# Altium PCB Due_Breakout_Board.PcbDoc
Units mil, origin at the board's own origin, x right, y up, seen from the top; angles counter-clockwise.
Board outline 6000 x 4000 mil, 4 copper layers (Top Layer, +5V Layer, +3.3V Layer, Bottom Layer), stack 30.634 mil thick; 39 components, 98 nets, 254 pads, 4 vias.
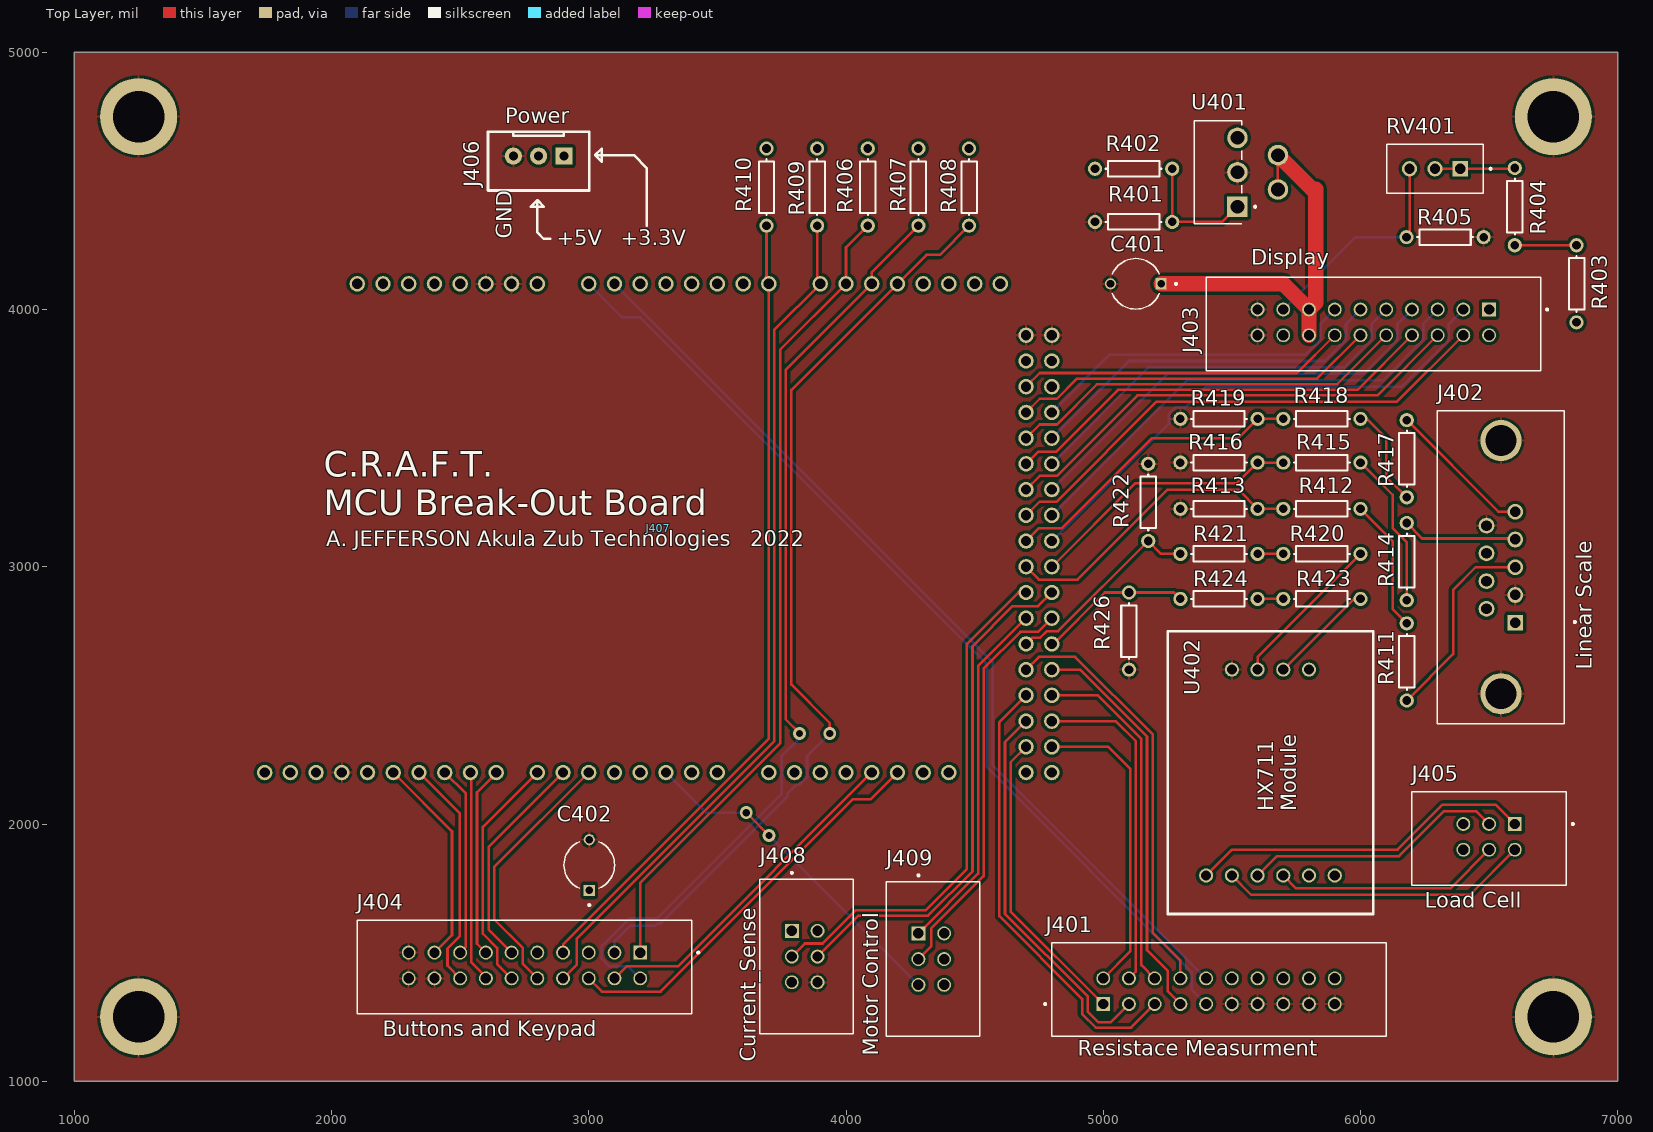
[diagram p0: Top Layer view]
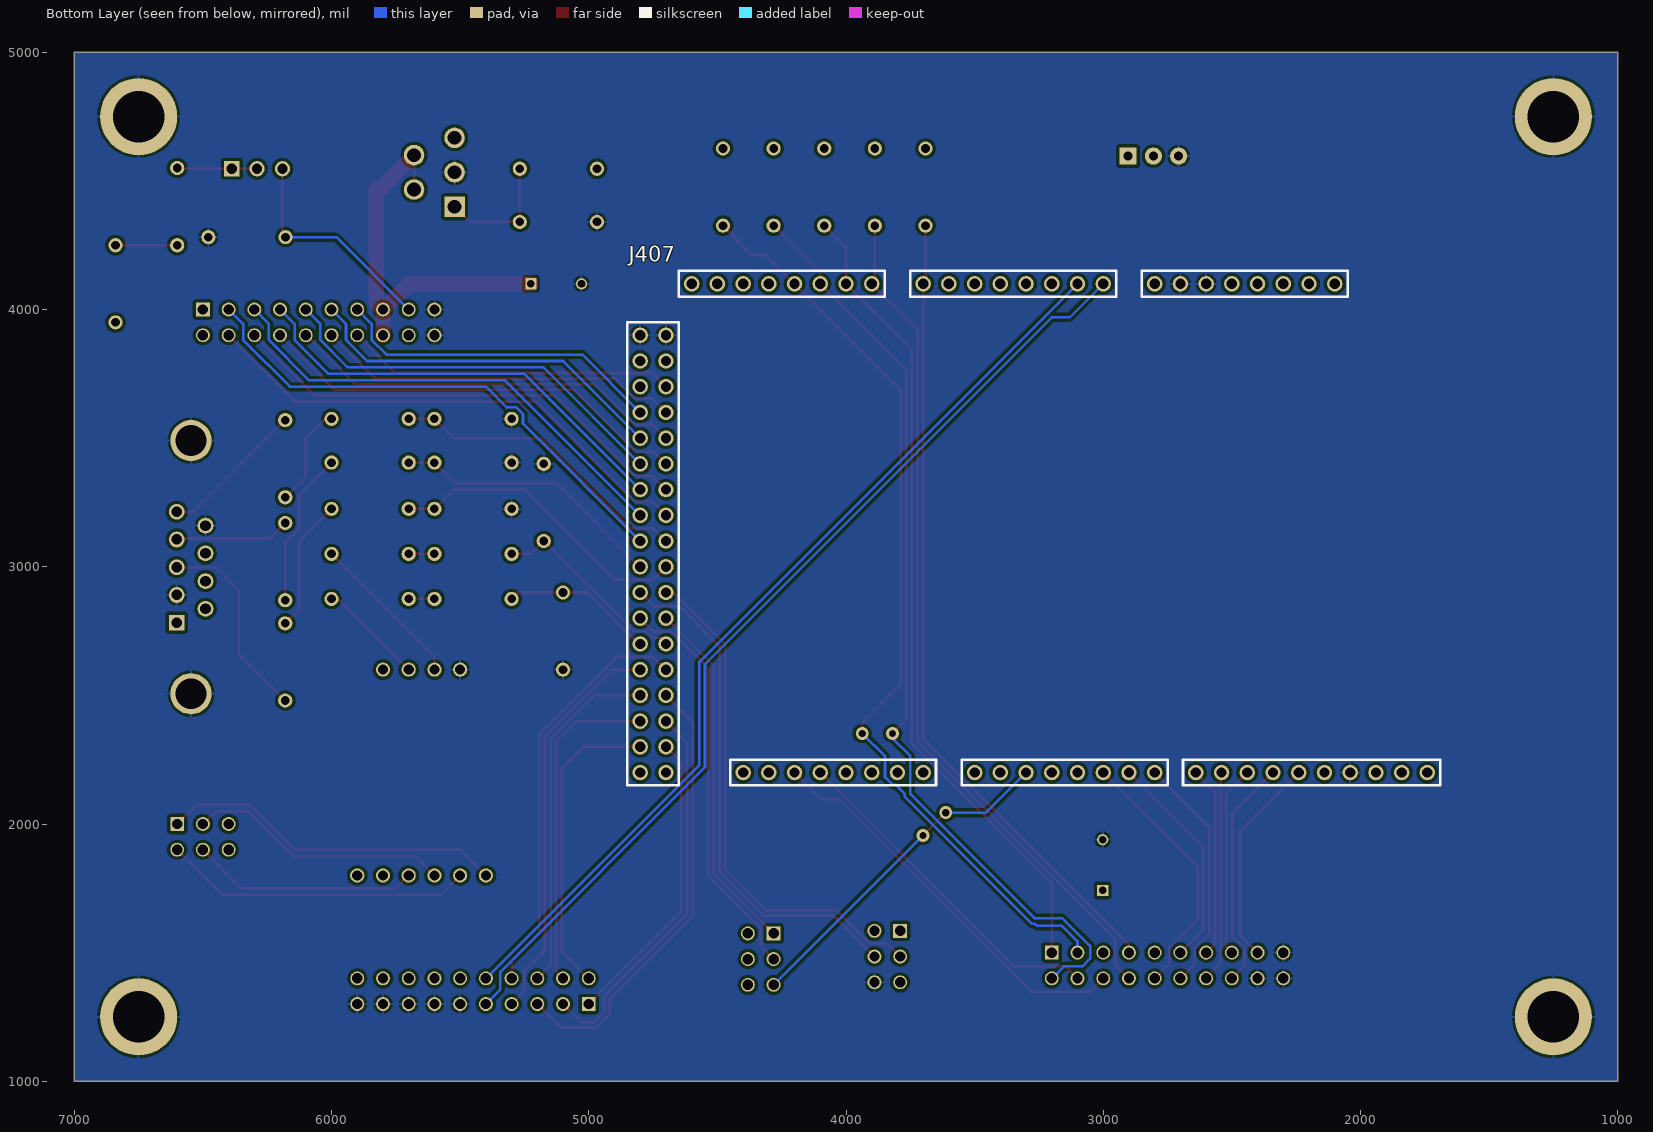
[diagram p1: Bottom Layer view, seen from below]
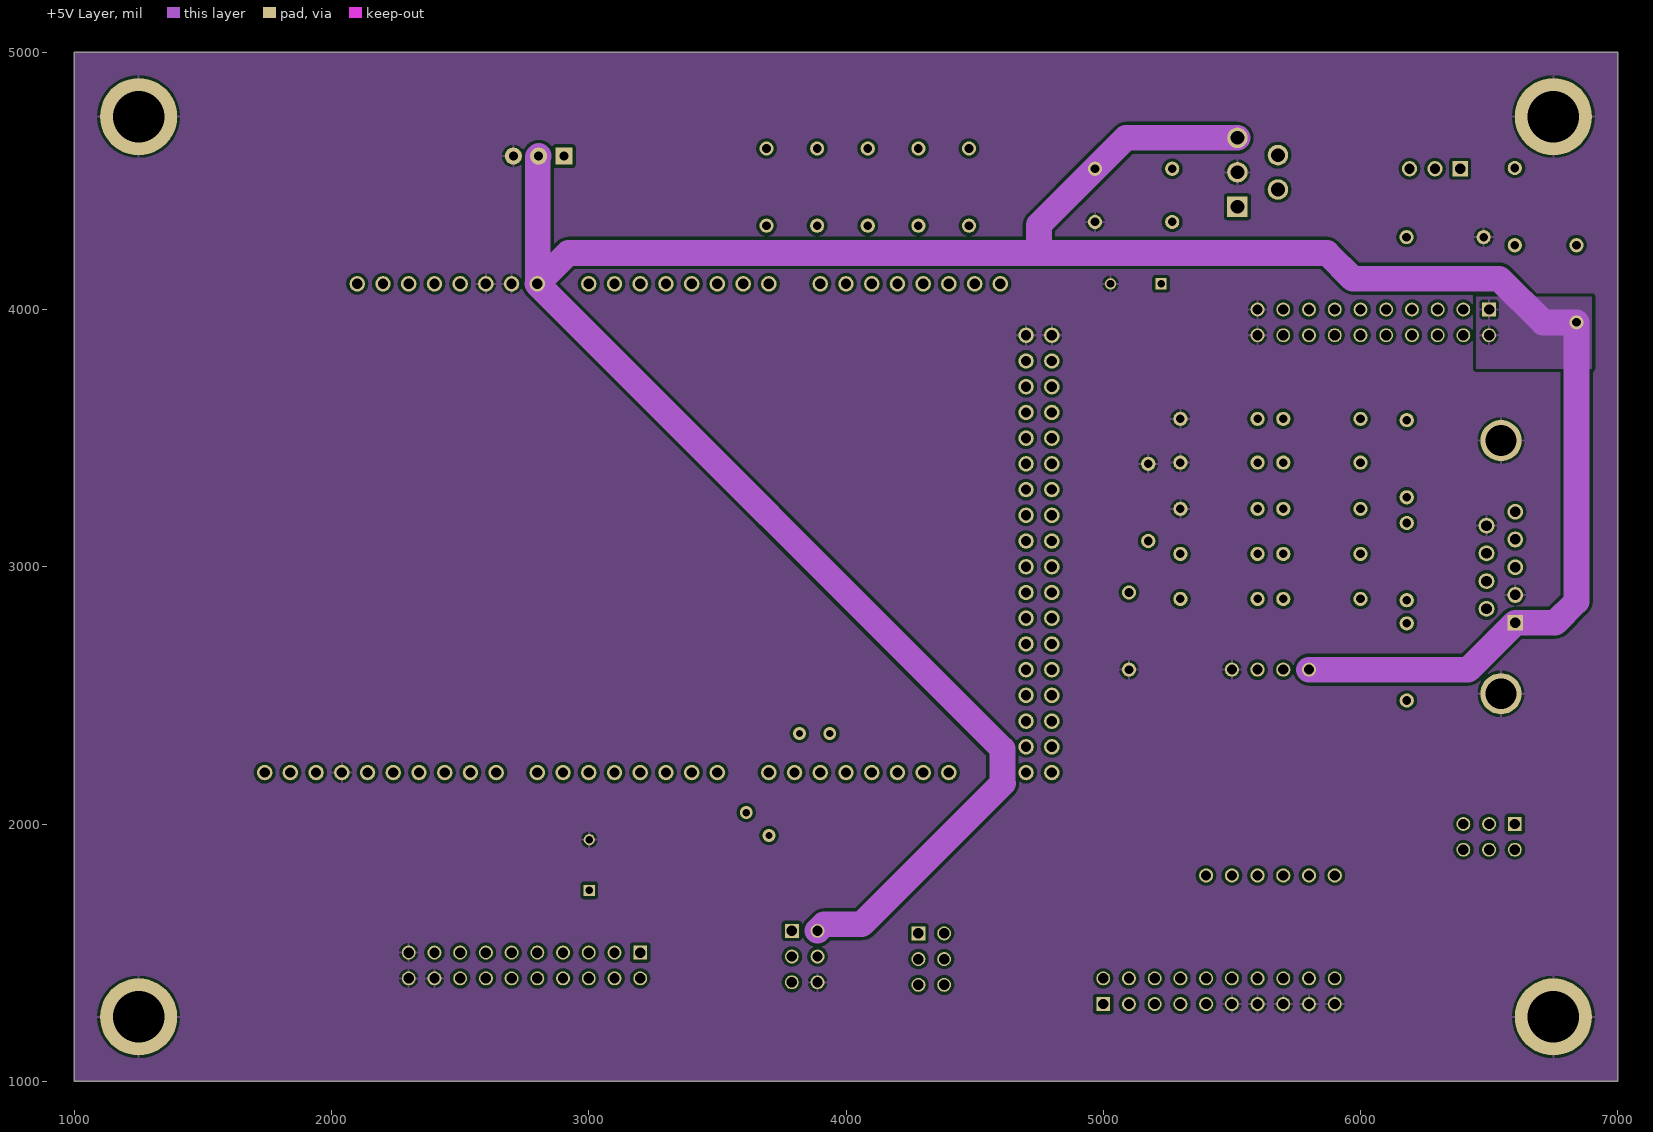
[diagram p2: +5V Layer]
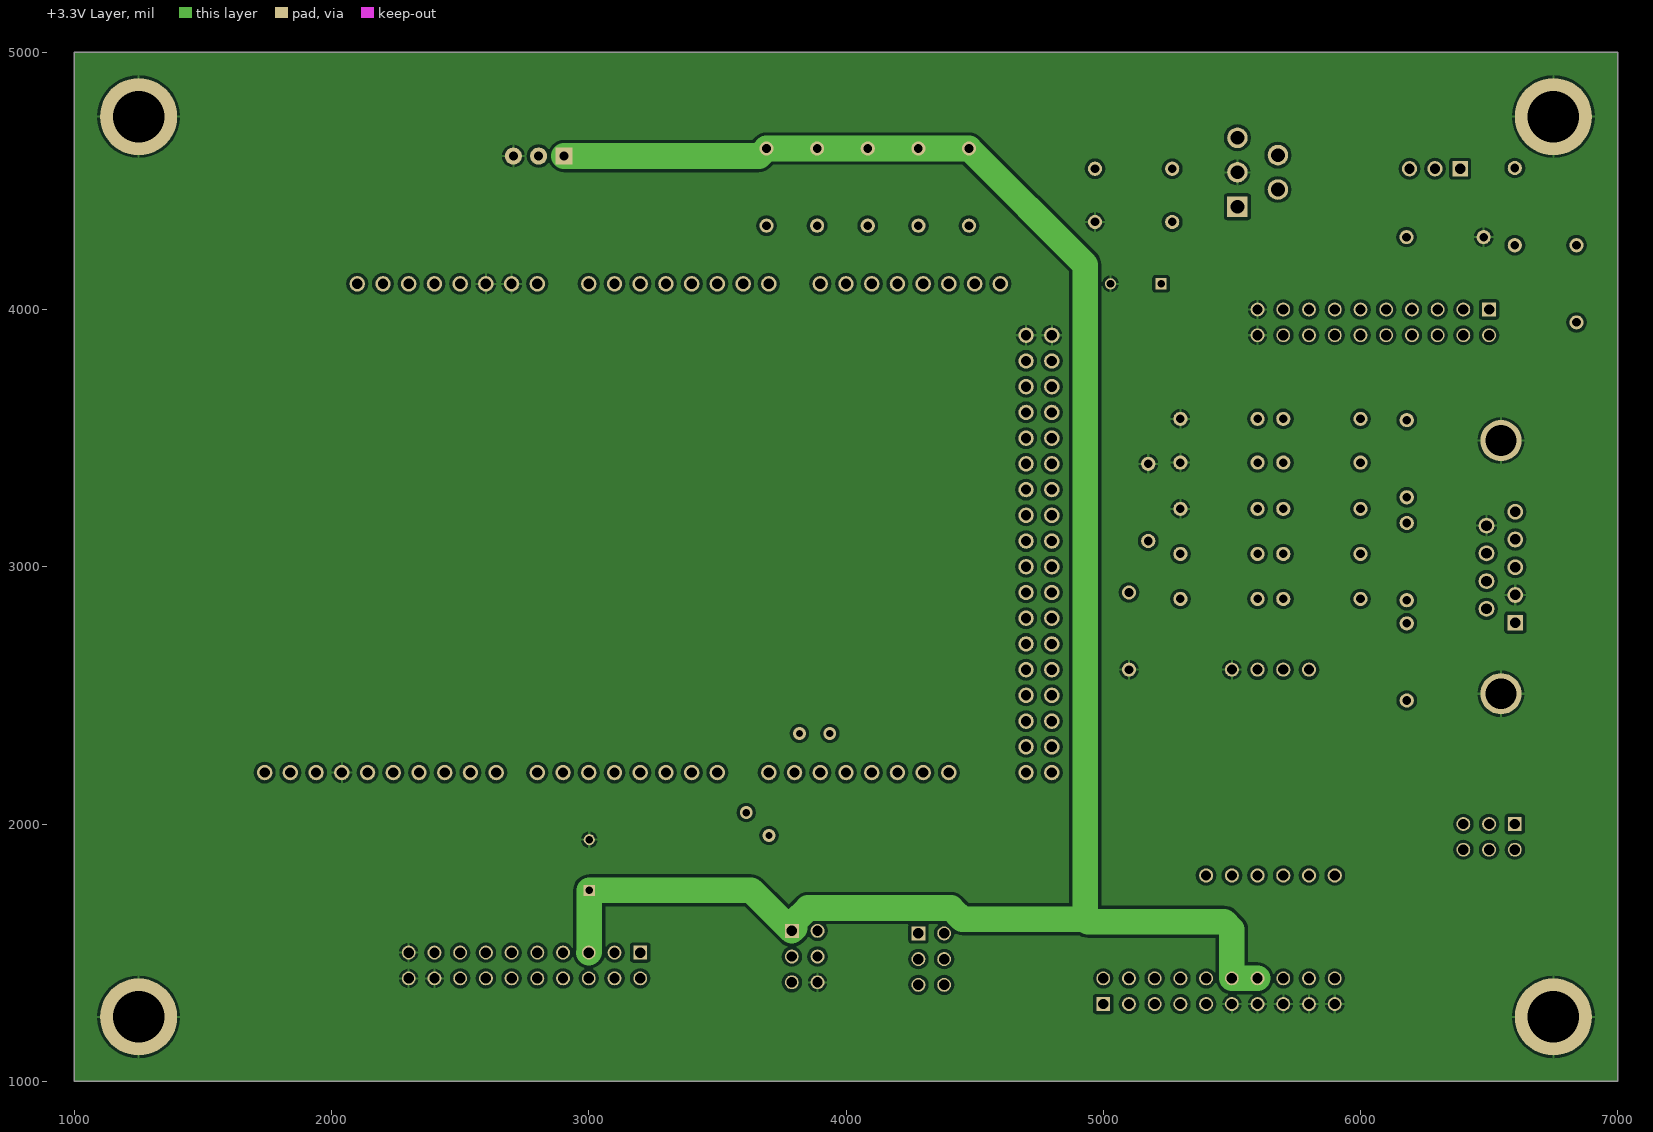
[diagram p3: +3.3V Layer]

## Layer stack, top to bottom
Top Solder: solder mask 0.4, Solder Resist, Dk 3.5
Top Layer: signal copper 1.4
Dielectric 1: core 10, FR-4, Dk 4.2
+5V Layer: signal copper 1.417
Dielectric 3: prepreg 5, Dk 4.2
+3.3V Layer: signal copper 1.417
Dielectric 2: core 10, Dk 4.2
Bottom Layer: signal copper 1.4
Bottom Solder: solder mask 0.4, Solder Resist, Dk 3.5

## Board outline
1000,1000 7000,1000 7000,5000 1000,5000

## Design rules (kind name [scope] priority, off if disabled: settings)
Clearance [All] p1: gap=11.81 ignorepadtopadclearanceinfootprint=FALSE
HoleSize [All] p1: absolutevalues=TRUE maxlimit=248.03 minlimit=1 maxpercent=80.000 minpercent=20.000
HoleToHoleClearance [All] p1: gap=19.68 allowstackedmicrovias=TRUE
PasteMaskExpansion [All] p1: expansion=1.97
PolygonConnect [All] p1: connectstyle=Relief reliefconductorwidth=10 reliefentries=4 polygonreliefangle="90 Angle" airgapwidth=10
RoutingVias [All] p1: holewidth=28 width=50 viastyle="Through Hole" minholewidth=19.68 minwidth=50 maxholewidth=28 maxwidth=50
SilkToSilkClearance [All] p1: silktosilkclearance=7
SilkToSolderMaskClearance [IsPad] p1: minsilkscreentomaskgap=7 clearancetoexposedcopper=TRUE
SolderMaskExpansion [All] p1: expansion=4
Width [All] p1: maxlimit=100 minlimit=10 preferedwidth=10
25 further rules are at their usual default settings.

## Classes and differential pairs
component class "Due_Breakout_Board supporting circuits": C401 C402 R401 R402 R403 R404 R405 R406 R407 R408 R409 R410 R411 R412 R413 R414 R415 R416 R417 R418 R419 R420 R421 R422 R423 R424 R426 RV401 U401 U402
component class "Due_Breakout_Board Headers": J6 J401 J402 J403 J404 J405 J406 J408 J409
component class Due_Breakout_Board: J407

## Components (designator, comment, footprint, x,y, rotation, side; value= is the part's Value field where it differs from the comment)
C401 "EEUHD1H1R0B" CAPPRD500W50D500H1100 5126.57,4100 r180 top
C402 "1uF" CAPPRD500W50D500H1100 3001.97,1840.55 r90 top
J401 "*" TE_1761681-7 5000,1300 r0 top locked
J402 "1-5747150-6" TE_1-5747150-6 6545.91,2998.39 r270 top
J403 "*" TE_1761681-7 6500,4000 r180 top
J404 "*" TE_1761681-7 3200,1500 r180 top
J405 "*" TE_1761681-1 6600,2000 r180 top
J406 "3pin Header Male Shrouded" "3Pin Header" 2805.12,4596.46 r180 top
J407 "Arduino Due Breakout" DUE_BREAKOUT 1740,2200 r0 top locked
J408 "*" TE_1761681-1 3789.37,1584.65 r270 top
J409 "*" TE_1761681-1 4281.5,1574.8 r270 top
R401 "7k" AXIAL-0.3 5118.11,4340.55 r0 top value=5%
R402 "3k" AXIAL-0.3 5118.11,4547.24 r180 top value=5%
R403 "7k" AXIAL-0.3 6840,4100 r270 top value=5%
R404 "7k" AXIAL-0.3 6600,4400 r270 top value=5%
R405 "3k" AXIAL-0.3 6328.74,4281.5 r180 top value=5%
R406 "1k" AXIAL-0.3 4084.65,4475.98 r90 top value=1K
R407 "1k" AXIAL-0.3 4281.5,4475.98 r90 top value=1K
R408 "1k" AXIAL-0.3 4478.35,4475.98 r90 top value=1K
R409 "1k" AXIAL-0.3 3887.8,4475.98 r270 top value=1K
R410 "1k" AXIAL-0.3 3690.94,4475.98 r270 top value=1K
R411 "1k" AXIAL-0.3 6180,2630 r270 top value=5%
R412 "3k" AXIAL-0.3 5850,3225 r0 top value=5%
R413 "7k" AXIAL-0.3 5450,3225 r0 top value=5%
R414 "1k" AXIAL-0.3 6180,3020 r90 top value=5%
R415 "3k" AXIAL-0.3 5850,3405 r0 top value=5%
R416 "7k" AXIAL-0.3 5450,3405 r0 top value=5%
R417 "1k" AXIAL-0.3 6180,3420 r90 top value=5%
R418 "3k" AXIAL-0.3 5850,3575 r0 top value=5%
R419 "7k" AXIAL-0.3 5450,3575 r0 top value=5%
R420 "1k" AXIAL-0.3 5850,3050 r0 top value=5%
R421 "3k" AXIAL-0.3 5450,3050 r0 top value=5%
R422 "7k" AXIAL-0.3 5175,3250 r270 top value=5%
R423 "1k" AXIAL-0.3 5850,2875 r0 top value=5%
R424 "R425" AXIAL-0.3 5450,2875 r0 top value=5%
R426 "7k" AXIAL-0.3 5100,2750 r90 top value=5%
RV401 "PV36W103C01B00" TRIM_PV36W103C01B00 6289.37,4547.24 r180 top
U401 "LM675T" TO170P1016X470X2092-5 5521.65,4399.61 r90 top
U402 "*" HX711_MOD 5600,2600 r90 top

## Footprints (in the part's own frame and the unit in brackets; to place one, negate y for a bottom-side part, rotate by r counter-clockwise, add the part's x,y. Pads: shape width x height; smd on the part's side, far side on the other; paste and mask are expansions set on the pad)
"3Pin Header" [mm] "2.5mm pitch header male shrouded"
  rect 1.7x1.7 hole 0.9: 1(-2.5,0)
  round 1.7 hole 0.9: 2(0,0) 3(2.5,0)
  silkscreen extent -5,-2.4 5,3.4
AXIAL-0.3 [mm] "Axial Device, Thru-Hole; 2 Leads; 0.3 in Pin Spacing"
  round 1.4 hole 0.85: 1(-3.81,0) 2(3.81,0)
  silkscreen extent -2.77,-0.76 2.77,0.76
CAPPRD500W50D500H1100 [mm]
  round 1.1 hole 0.75: N(2.5,0)
  rect 1.1x1.1 hole 0.75: P(-2.5,0)
  silkscreen extent -4.06,-2.5 2.32,2.5, body extent -2.75,-2.5 2.75,2.5, height 11
DUE_BREAKOUT [mil]
  round 60 hole 40: 0(0,0) 1(100,0) 2(400,0) 3(500,0) 3.3V(660,1900) 4(600,0) 5(700,0) 5V(760,1900) 5V(2960,0) 5V(3060,0) 6(800,0) 7(900,0) 8(1060,0) 9(1160,0) 10(1260,0) 11(1360,0) 12(1460,0) 13(1560,0) 14(1660,0) 15(1760,0) 16(1960,0) 17(2060,0) 18(2160,0) 19(2260,0) 20(2360,0) 21(2460,0) 22(2560,0) 23(2660,0) 24(2960,100) 25(3060,100) 26(2960,200) 27(3060,200) 28(2960,300) 29(3060,300) 30(2960,400) 31(3060,400) 32(2960,500) 33(3060,500) 34(2960,600) 35(3060,600) 36(2960,700) 37(3060,700) 38(2960,800) 39(3060,800) 40(2960,900) 41(3060,900) 42(2960,1000) 43(3060,1000) 44(2960,1100) 45(3060,1100) 46(2960,1200) 47(3060,1200) 48(2960,1300) 49(3060,1300) 50(2960,1400) 51(3060,1400) 52(2960,1500) 53(3060,1500) 54(2960,1600) 55(3060,1600) 56(2860,1900) 57(2760,1900) 58(2660,1900) 59(2560,1900) 60(2460,1900) 61(2360,1900) 62(2260,1900) 63(2160,1900) 64(1960,1900) 65(1860,1900) 66(1760,1900) 67(1660,1900) 68(1560,1900) 69(1460,1900) 70(1360,1900) 71(1260,1900) AREF(200,0) GND(300,0) GND(860,1900) GND(960,1900) GND(2960,1700) GND(3060,1700) IOREF(460,1900) NC(360,1900) RESET(560,1900) VIN(1060,1900)
  body extent -50,-50 3110,1950
HX711_MOD [mm] "the green one"
  round 1.4 hole 1: A+(-20.32,-2.54) A-(-20.32,0) B+(-20.32,-7.62) B-(-20.32,-5.08) DT(0,0) E+(-20.32,5.08) E-(-20.32,2.54) GND(0,2.54) SCK(0,-2.54) VCC(0,-5.08)
  silkscreen extent -24.13,-11.43 3.81,8.89
TE_1-5747150-6 [mm]
  rect 1.56x1.56 hole 1.04: 1(5.485,1.42)
  round 1.56 hole 1.04: 2(2.745,1.42) 3(0.005,1.42) 4(-2.735,1.42) 5(-5.475,1.42) 6(4.115,-1.42) 7(1.375,-1.42) 8(-1.365,-1.42) 9(-4.105,-1.42)
  round 4.066 hole 3.05: S1(-12.495,0) S2(12.495,0)
  silkscreen extent -15.45,-6.27 15.45,7.4, body extent -15.72,-6.55 15.72,7.5
TE_1761681-1 [mm]
  rect 1.37x1.37 hole 1.02: 1(0,0)
  round 1.37 hole 1.02: 2(0,2.54) 3(2.54,0) 4(2.54,2.54) 5(5.08,0) 6(5.08,2.54)
  silkscreen extent -5.83,-3.18 10.16,6.04, body extent -5.93,-3.45 10.43,6.32
TE_1761681-7 [mm]
  rect 1.37x1.37 hole 1.02: 1(0,0)
  round 1.37 hole 1.02: 2(0,2.54) 3(2.54,0) 4(2.54,2.54) 5(5.08,0) 6(5.08,2.54) 7(7.62,0) 8(7.62,2.54) 9(10.16,0) 10(10.16,2.54) 11(12.7,0) 12(12.7,2.54) 13(15.24,0) 14(15.24,2.54) 15(17.78,0) 16(17.78,2.54) 17(20.32,0) 18(20.32,2.54) 19(22.86,0) 20(22.86,2.54)
  silkscreen extent -5.83,-3.17 27.94,6.04, body extent -5.93,-3.45 28.21,6.32
TO170P1016X470X2092-5 [mm]
  rect 2.025x2.025 hole 1.35: 1(0,0)
  round 2.025 hole 1.35: 2(1.7,-4) 3(3.4,0) 4(5.1,-4) 5(6.8,0)
  silkscreen extent -1.68,-1.86 8.48,4.28, body extent -2.02,-5.29 8.82,4.56
TRIM_PV36W103C01B00 [mm]
  rect 1.508x1.508 hole 1: 1(-2.5,0)
  round 1.508 hole 1: 2(0,0) 3(2.5,0)
  silkscreen extent -5.6,-2.41 4.76,2.42

## Part data
C401: "Cap Aluminum Lytic 1uF 50V 20% (5 X 11mm) Radial 5mm 10mA 1000h 105°C Automotive Ammo", Package="RADIAL-2 Panasonic", Availability="In Stock", Check_prices=https://www.snapeda.com/parts/EEUHD1H1R0B/Panasonic/view-part/5786221/?ref=eda, MF=Panasonic, MP=EEUHD1H1R0B, Price=None, SnapEDA_Link=https://www.snapeda.com/parts/EEUHD1H1R0B/Panasonic/view-part/5786221/?ref=snap
C402: library part EEUHD1H1R0B, "Cap Aluminum Lytic 1uF 50V 20% (5 X 11mm) Radial 5mm 10mA 1000h 105°C Automotive Ammo", Package="RADIAL-2 Panasonic", Availability="In Stock", Check_prices=https://www.snapeda.com/parts/EEUHD1H1R0B/Panasonic/view-part/5786221/?ref=eda, MF=Panasonic, MP=EEUHD1H1R0B, Price=None, SnapEDA_Link=https://www.snapeda.com/parts/EEUHD1H1R0B/Panasonic/view-part/5786221/?ref=snap
J401 J403 J404: library part 1761681-7, "IDC LOW PRO HDR 50P VERT HT BLACK", Package=None, Availability=Unavailable, MP=1761681-7, Price=None
J402: "9 Position D-Sub Receptacle, Female Sockets Connector", Package=None, Availability=Unavailable, Centerline_Pitch="2.74 mm[.108 in]", MF="TE Connectivity", MP=1-5747150-6, Number_of_Positions=9, Price=None, Product_Type=Connector, SnapEDA_Link=https://www.snapeda.com/parts/1-5747150-6/TE%20Connectivity%20AMP%20Connectors/view-part/2374527/?ref=snap, TE_purchase_URL=https://www.te.com/usa-en/product-1-5747150-6.html?te_bu=Cor&te_type=disp&te_campaign=seda_glo_cor-seda-global-disp-prtnr-fy19-seda-model-bom-cta_sma-317_1&elqCampaignId=32493
J405 J408 J409: library part 1761681-1, Package=None, Availability=Unavailable, MF="{'manufacturer': 'TE Connectivity'}", MP=1761681-1, Price=None
J407: library part Arduino_Due
R401 R402 R403 R404 R405 R406 R407 R408 R409 R410 R411 R412 R413 R414 R415 R416 R417 R418 R419 R420 R421 R422 R423 R424 R426: library part Res1, "Resistor", LatestRevisionDate=17-Jul-2002, LatestRevisionNote="Re-released for DXP Platform.", PackageDescription="Axial Device, Thru-Hole; 2 Leads; 0.3 in Pin Spacing", PackageReference=AXIAL-0.3, Published=8-Jun-2000, Publisher="Altium Limited"
RV401: "10 kOhms 0.5W, 1/2W PC Pins Through Hole Trimmer Potentiometer Cermet 25 Turn Top Adjustment", Package="6332 Bourns", Availability=Unavailable, MF=Bourns, MP=PV36W103C01B00, Price=None, SnapEDA_Link=https://www.snapeda.com/parts/PV36W103C01B00/Bourns/view-part/1439094/?ref=snap
U401: "Power Operational Amplifier 5-TO-220 0 to 70", Package="TO-220-5 Texas Instruments", Availability=Good, Check_prices=https://www.snapeda.com/parts/LM675T/Texas%20Instruments/view-part/559237/?ref=eda, MF="Texas Instruments", MP=LM675T, Price=None, Purchase-URL=https://pricing.snapeda.com/search/part/LM675T/?ref=eda, SnapEDA_Link=https://www.snapeda.com/parts/LM675T/Texas%20Instruments/view-part/559237/?ref=snap
U402: library part HX711_MOD

## Free pads (board coordinates)
  round 300 hole 200: HOLE(1250,1250) HOLE(1250,4750) HOLE(6750,1250) HOLE(6750,4750)

## Via types
v1: diameter 50, hole 28, Top Layer to Bottom Layer, 4 vias

## Nets (pads, with @x,y where several pads share a name; then routed paths per layer and width w, separated by ;. In a path a pad name is that pad's centre, name@x,y a point inside that pad or via, vN(x,y) a via of type N, cw(c..) or ccw(c..) an arc to the next point about the centre after c; other vN are vias at no path point)
+3.3V: C402.P J401.12 J401.14 J404.5 J406.1 J408.1 R406.2 R407.2 R408.2 R409.1 R410.1 | length 7952.6
  +3.3V Layer w100: J406.1 3661.42,4596.46 R410.1 R409.1 R406.2 R407.2 R408.2 4930,4174.33 4930,2900 4930,1630 ; J404.5 3001.97,1501.97 C402.P 3631.89,1742.13 J408.1 3800.59,1595.87 3800.59,1621.42 3852.6,1673.43 4408.43,1673.43 4451.85,1630 4930,1630 ; J401.14 J401.12 5500,1590 5470,1620 4940,1620 4930,1630
+5V: J402.1 J403.1 J403.2 J406.2 J407.VIN J408.2 R402.2 R403.2 U401.5 U402.VCC | length 11602.6
  +5V Layer w100: J406.2 2801.97,4593.31 J407.VIN@2801.97,4101.97 ; J408.2 3914.72,1610 4061.65,1610 4610,2158.35 4608.19,2160.16 4608.19,2291.81 J407.VIN J407.VIN@2801.97,4101.97 ; U401.5 5088.19,4667.32 R402.2 4750,4329.13 4750,4220 ; U402.VCC 6419.37,2600 J402.1 6757.44,2782.44 6840,2865 R403.2 6710,3950 6540,4120 5970,4120 5870,4220 4750,4220 ; J407.VIN@2801.97,4101.97 2920,4220 4750,4220
DT: R420.2 U402.DT | length 615.7
  Top Layer w10: U402.DT 5600,2650 R420.2
GND: C401.N C402.N J401.11 J401.13 J401.15 J401.17 J401.19 J402.2 J402.9 J402.S1 J402.S2 J403.19 J403.20 J404.18 J404.19 J404.20 J406.3 J407.GND J408.6 pad.HOLE R401.1 R405.1 R413.1 R416.1 R419.1 R422.1 R426.1 U401.3 U402.GND
NetC401_P: C401.P J403.15 J403.16 U401.2 U401.4 | length 1532.1
  Top Layer w10: U401.2 U401.4
  Top Layer w60: C401.P 5700,4100 J403.15 ; U401.4 5811.02,4468.5 5826.77,4468.5 5826.77,4026.77 J403.15 ; J403.16 J403.15
NetJ401_1: J401.1 J407.24 | length 1174
  Top Layer w10: J407.24 4640,2240 4640,1660 J401.1
NetJ401_2: J401.2 J407.25 | length 1198.3
  Top Layer w10: J407.25 5020,2300 5104.57,2215.43 5104.57,1504.57 J401.2
NetJ401_3: J401.3 J407.26 | length 1502.7
  Top Layer w10: J407.26 4618.19,2318.19 4618.19,1650.97 4940,1329.15 4940,1270 4980,1230 5030,1230 J401.3
NetJ401_4: J401.4 J407.27 | length 1291.6
  Top Layer w10: J407.27 5048.31,2400 5126.38,2321.93 5126.38,1426.38 J401.4
NetJ401_5: J401.5 J407.28 | length 1757
  Top Layer w10: J407.28 4596.38,2396.38 4596.38,1641.93 4918.19,1320.12 4918.19,1260.97 4970.97,1208.19 5108.19,1208.19 J401.5
NetJ401_6: J401.6 J407.29 | length 1370.6
  Top Layer w10: J407.29 4979.15,2500 5148.19,2330.97 5148.19,1451.81 J401.6
NetJ401_7: J401.7 J407.31 | length 1571.5
  Top Layer w10: J407.31 4910,2600 5170,2340 5170,1510 5250,1430 5250,1350 J401.7
NetJ401_8: J401.8 J407.30 | length 1631
  Top Layer w10: J407.30 4750,2650 4890.85,2650 5191.81,2349.03 5191.81,1578.19 5300,1470 J401.8
NetJ401_9: J401.9 J407.71 | length 3834.6
  Bottom Layer w10: J407.71 3130,3970 3199.15,3970 4548.19,2620.97 4548.19,2220.97 5343.78,1425.38 5343.78,1356.22 J401.9
NetJ401_10: J401.10 J407.70 | length 3652.7
  Bottom Layer w10: J407.70 4570,2630 4570,2230 J401.10
NetJ402_3: J402.3 R411.2 | length 782.9
  Top Layer w10: R411.2 6360,2660 6360,2910 6448.19,2998.19 J402.3
NetJ402_4: J402.4 R414.2 | length 457.6
  Top Layer w10: R414.2 6240,3110 6597.87,3110 J402.4
  Bottom Layer w10: J402.4@6600,3090.67 J402.4@6600,3100
NetJ402_5: J402.5 R417.2 | length 569.3
  Top Layer w10: R417.2 6536.06,3213.94 J402.5
NetJ403_3: J403.3 J407.41 | length 2032
  Bottom Layer w10: J407.41 5256.13,3556.13 5255.63,3556.62 5255.63,3593.38 5281.62,3619.37 5318.38,3619.37 5318.87,3618.87 5400,3700 6161.91,3700 6343.78,3881.87 6343.78,3943.78 J403.3
NetJ403_4: J403.4 J407.42 | length 1989.9
  Top Layer w10: J407.42 4753.19,3253.19 4819.39,3253.19 5207.93,3641.73 6141.73,3641.73 J403.4
NetJ403_5: J403.5 J407.43 | length 1867.6
  Bottom Layer w10: J407.43 5325,3725 6086.91,3725 6243.78,3881.87 6243.78,3943.78 J403.5
NetJ403_6: J403.6 J407.44 | length 1848.5
  Top Layer w10: J407.44 4753.19,3353.19 4819.72,3353.19 5132.48,3665.95 6065.94,3665.95 J403.6
NetJ403_7: J403.7 J407.45 | length 1726.2
  Bottom Layer w10: J407.45 5250,3750 6011.91,3750 6143.78,3881.87 6143.78,3943.78 J403.7
NetJ403_8: J403.8 J407.46 | length 1707.1
  Top Layer w10: J407.46 4746.81,3446.81 4815.98,3446.81 5056.93,3687.76 5987.76,3687.76 J403.8
NetJ403_9: J403.9 J407.47 | length 1584.8
  Bottom Layer w10: J407.47 5175,3775 5936.91,3775 6043.78,3881.87 6043.78,3943.78 J403.9
NetJ403_10: J403.10 J407.48 | length 1565.7
  Top Layer w10: J407.48 4753.19,3553.19 4819.39,3553.19 4975.77,3709.57 5909.57,3709.57 J403.10
NetJ403_11: J403.11 J407.49 | length 1443.4
  Bottom Layer w10: J407.49 5100,3800 5861.91,3800 5943.78,3881.87 5943.78,3943.78 J403.11
NetJ403_12: J403.12 J407.50 | length 1424.3
  Top Layer w10: J407.50 4753.19,3653.19 4819.39,3653.19 4897.58,3731.38 5831.38,3731.38 J403.12
NetJ403_13: J403.13 J407.51 | length 1302
  Bottom Layer w10: J407.51 5025,3825 5786.91,3825 5843.78,3881.87 5843.78,3943.78 J403.13
NetJ403_14: J403.14 J407.52 | length 1282.8
  Top Layer w10: J407.52 4753.19,3753.19 5753.19,3753.19 J403.14
NetJ403_17: J403.17 R405.2 RV401.3 | length 866.1
  Top Layer w10: R405.2 6190.94,4293.7 RV401.3
  Bottom Layer w10: J403.17 5981.5,4281.5 R405.2
NetJ404_1: J404.1 J407.62 R406.1 | length 3192.4
  Top Layer w10: J404.1 3200,1770.2 3743.62,2313.82 3743.62,3843.62 J407.62 4000,4241.34 R406.1
NetJ404_2: J404.2 J407.61 R407.1 | length 3647.4
  Top Layer w10: v1(3818.9,2352.36) 3818.9,2353.7 3765.43,2407.17 3765.43,3765.43 J407.61 4100,4144.49 R407.1
  Bottom Layer w10: J404.2 3153.15,1446.85 3080.71,1446.85 3051.18,1476.38 3051.18,1525.59 3159.45,1633.86 3267.72,1633.86 3750,2116.14 3750,2263.78 3818.9,2332.68 v1(3818.9,2352.36)
NetJ404_3: J404.3 J407.60 R408.1 | length 3622.5
  Top Layer w10: v1(3937.01,2352.36) 3937.01,2391.73 3787.24,2541.5 3787.24,3687.24 J407.60 4312.6,4212.6 4364.96,4212.6 R408.1
  Bottom Layer w10: J404.3 3100,1543.56 3160.77,1604.33 3257.87,1604.33 3265.59,1612.05 3276.75,1612.05 3771.81,2107.11 3771.81,2118.27 3806.73,2153.19 3819.39,2153.19 3848.43,2182.22 3848.43,2263.78 v1(3937.01,2352.36)
NetJ404_4: J404.4 J407.20 | length 1331.4
  Top Layer w10: J404.4 3146.85,1446.85 3346.85,1446.85 J407.20
NetJ404_6: J404.6 J407.21 | length 1574.1
  Top Layer w10: J404.6 3051.57,1348.43 3279.27,1348.43 4027.3,2096.46 4096.46,2096.46 J407.21
NetJ404_7: J404.7 J407.64 R410.2 | length 3161.1
  Top Layer w10: J404.7 2900,1531.89 3700,2331.89 J407.64 3690.94,4109.06 R410.2
NetJ404_8: J404.8 J407.63 R409.2 | length 3345.3
  Top Layer w10: J404.8 2952.76,1452.76 2952.76,1553.8 3721.81,2322.86 3721.81,3921.81 J407.63 3887.8,4112.2 R409.2
NetJ404_10: J404.10 J407.10 | length 1021.8
  Top Layer w10: J404.10 2743.78,1456.22 2743.78,1518.13 2632.2,1629.71 2632.2,1832.2 J407.10
NetJ404_11: J404.11 J407.9 | length 857.1
  Top Layer w10: J404.11 2610.39,1589.61 2610.39,1910.39 J407.9
NetJ404_12: J404.12 J407.8 | length 933.7
  Top Layer w10: J404.12 2643.78,1456.22 2643.78,1518.13 2588.58,1573.33 2588.58,1988.58 J407.8
NetJ404_13: J404.13 J407.7 | length 745.1
  Top Layer w10: J404.13 2565.59,1534.41 2565.59,2122.68 2640,2197.09 J407.7
NetJ404_14: J404.14 J407.6 | length 824.9
  Top Layer w10: J407.6 2543.78,2196.22 2543.78,1462.13 2600,1405.91 J404.14
NetJ404_15: J404.15 J407.5 | length 743.1
  Top Layer w10: J407.5 2521.97,2118.03 2521.97,1521.97 J404.15
NetJ404_16: J404.16 J407.4 | length 905.3
  Top Layer w10: J407.4 2497.87,2042.13 2497.87,1562.83 2450.79,1515.75 2450.79,1449.21 J404.16
NetJ404_17: J404.17 J407.3 | length 822.9
  Top Layer w10: J407.3 2468.35,1971.65 2468.35,1568.35 J404.17
NetJ405_1: J405.1 U402.E+ | length 1345
  Top Layer w10: U402.E+ 5500,1900 6144.15,1900 6319.15,2075 6525,2075 J405.1
NetJ405_2: J405.2 U402.E- | length 1203.6
  Top Layer w10: U402.E- 5575,1725 6425,1725 J405.2
NetJ405_3: J405.3 U402.A- | length 1024.3
  Top Layer w10: U402.A- 5675,1875 6150,1875 6325,2050 6450,2050 J405.3
NetJ405_4: J405.4 U402.A+ | length 882.8
  Top Layer w10: U402.A+ 5750,1750 6350,1750 J405.4
NetJ407_0: J407.0
NetJ407_1: J407.1
NetJ407_2: J407.2
NetJ407_11: J407.11
NetJ407_12: J407.12
NetJ407_13: J407.13 J409.5 | length 1323.3
  Top Layer w10: v1(3612.2,2044.09) v1(3700.79,1955.51)
  Bottom Layer w10: J407.13 3455.91,2044.09 v1(3612.2,2044.09) ; v1(3700.79,1955.51) J409.5
NetJ407_14: J407.14
NetJ407_15: J407.15
NetJ407_16: J407.16
NetJ407_17: J407.17
NetJ407_18: J407.18
NetJ407_19: J407.19
NetJ407_22: J407.22
NetJ407_23: J407.23
NetJ407_32: J407.32 R421.1 R422.2 | length 786.4
  Top Layer w10: J407.32 4724.25,2724.25 4755.1,2724.25 4780.85,2750 4825,2750 R422.2 5225,3050 R421.1
NetJ407_33: J407.33 R424.1 R426.2 | length 593.2
  Top Layer w10: J407.33 4805.85,2700 5005.85,2900 R426.2 5275,2900 R424.1
NetJ407_34: J407.34 J409.1 | length 1398.5
  Top Layer w10: J409.1 4513.62,1806.93 4513.62,2613.62 J407.34
NetJ407_35: J407.35 J409.3 | length 1580.5
  Top Layer w10: J409.3 4330.71,1524.02 4330.71,1593.17 4535.43,1797.89 4535.43,2604.59 4677.66,2746.81 4746.81,2746.81 J407.35
NetJ407_36: J407.36 J408.3 | length 2009.3
  Top Layer w10: J408.3 3840.16,1535.43 3909.31,1535.43 4039.39,1665.51 4310.51,1665.51 4470,1825 4470,2699.66 4670.34,2900 J407.36
NetJ407_37: J407.37 J408.4 | length 2009.3
  Top Layer w10: J408.4 4048.43,1643.7 4319.55,1643.7 4491.81,1815.96 4491.81,2690.63 4647.99,2846.81 4746.81,2846.81 J407.37
NetJ407_38: J407.38 R412.1 R413.2 | length 1196.8
  Top Layer w10: J407.38 4750,2950 4900,2950 5250,3300 5525,3300 R413.2 R412.1
NetJ407_39: J407.39 R415.1 R416.2 | length 1067.8
  Top Layer w10: J407.39 5125,3325 5520,3325 R416.2 R415.1
NetJ407_40: J407.40 R418.1 R419.2 | length 1196.8
  Top Layer w10: J407.40 4750,3150 4840,3150 5190,3500 5525,3500 R419.2 R418.1
NetJ407_53: J407.53
NetJ407_54: J407.54
NetJ407_55: J407.55
NetJ407_56: J407.56
NetJ407_57: J407.57
NetJ407_58: J407.58
NetJ407_59: J407.59
NetJ407_65: J407.65
NetJ407_66: J407.66
NetJ407_67: J407.67
NetJ407_68: J407.68
NetJ407_69: J407.69
NetJ407_AREF: J407.AREF
NetJ407_IOREF: J407.IOREF
NetJ407_RESET: J407.RESET
NetJ408_5: J408.5
NetR401_2: R401.2 R402.1 U401.1 | length 484.7
  Top Layer w10: R402.1 R401.2 5462.6,4340.55 U401.1
NetR403_1: R403.1 R404.2 | length 240
  Top Layer w10: R404.2 R403.1
NetR404_1: R404.1 RV401.1 RV401.2 | length 311.8
  Top Layer w10: RV401.2 RV401.1 6597.24,4547.24 R404.1
NetR411_1: R411.1 R412.2 | length 519.6
  Top Layer w10: R412.2 6125,3100 6125,2835 R411.1
NetR414_1: R414.1 R415.2 | length 609.6
  Top Layer w10: R415.2 6125,3280 6125,3150 6180,3095 R414.1
NetR417_1: R417.1 R418.2 | length 394.2
  Top Layer w10: R418.2 6025,3575 6100,3500 6100,3350 R417.1
NetR420_1: R420.1 R421.2 | length 100
  Top Layer w10: R421.2 R420.1
NetR423_1: R423.1 R424.2 | length 100
  Top Layer w10: R424.2 R423.1
SCK: R423.2 U402.SCK | length 413.9
  Top Layer w10: U402.SCK 5975,2875 R423.2
pads on no net: J401.16 J401.18 J401.20 J402.6 J402.7 J402.8 J403.18 J404.9 J405.5 J405.6 J407.3.3V J407.5V J407.NC J409.2 J409.4 J409.6 U402.B+ U402.B-

## Polygon pours and split planes (outlines as drawn)
GND on +5V Layer "Bottom Layer-No Net" (solid, pour order 10): 1000,5000 7000,5000 7000,1000 1000,1000
+5V on +5V Layer "Bottom Layer-No Net" (solid, pour order 6): 6450,4050 6900,4050 6900,3780 6900,3770 6450,3770
GND on +3.3V Layer "Bottom Layer-No Net" (solid, pour order 12): 1000,5000 7000,5000 7000,1000 1000,1000
GND on Bottom Layer "Bottom Layer-No Net" (solid, pour order 16): 1000,5000 7000,5000 7000,1000 1000,1000
GND on Top Layer "Bottom Layer-No Net" (solid, pour order 18): 1000,5000 7000,5000 7000,1000 1000,1000

## Silkscreen, mask and mechanical layers (free items; w line width, h text height)
Top Overlay:
  lines w10: 2850,4275 2825,4275 2800,4300 2800,4325 2800,4350 2800,4425 ; 3225,4325 3225,4550 3175,4600 3025,4600 ; 2800,4425 2775,4400 2825,4400 2800,4425 ; 3025,4600 3050,4575 3050,4625 3025,4600
  text "Power" at 2675,4725 h60
  text "GND" at 2700,4275 h60 r90
  text "+5V" at 2875,4250 h60
  text "+3.3V" at 3125,4250 h60
  text "Display" at 5575,4175 h60
  text "C.R.A.F.T.  / MCU Break-Out Board" at 1970,3200 h100
  text "A. JEFFERSON Akula Zub Technologies   2022" at 1980,3080 h60
  text "Linear Scale" at 6900,2600 h60 r90
  text "Load Cell" at 6250,1675 h60
  text "Buttons and Keypad" at 2200,1175 h60
  text "Motor Control" at 4125,1100 h60 r90
  text "Resistace Measurment" at 4900,1100 h60
  text "Current_Sense" at 3650,1075 h60 r90
Mechanical 1:
  the board outline again, w10

## Dimensions
1000,1000 to 1000,5000 on Mechanical 1
1000,1000 to 7000,1000 on Mechanical 1
1000,1000 to 1250,1050 on Mechanical 1
1000,1000 to 900,1250 on Mechanical 1

## Text inside footprints (layer, text, board x,y; h text height)
U402: Top Overlay "HX711 / Module" at 5750,2050 h60 r90